# Altium PCB AIRCRAFT.PcbDoc (part 2 of 2)
Units mm, origin at the board's own origin, x right, y up, seen from the top; angles counter-clockwise.
Board outline 152.4 x 101.6 mm, 2 copper layers (Top Layer, Bottom Layer); 97 components, 77 nets, 515 pads, 0 vias.
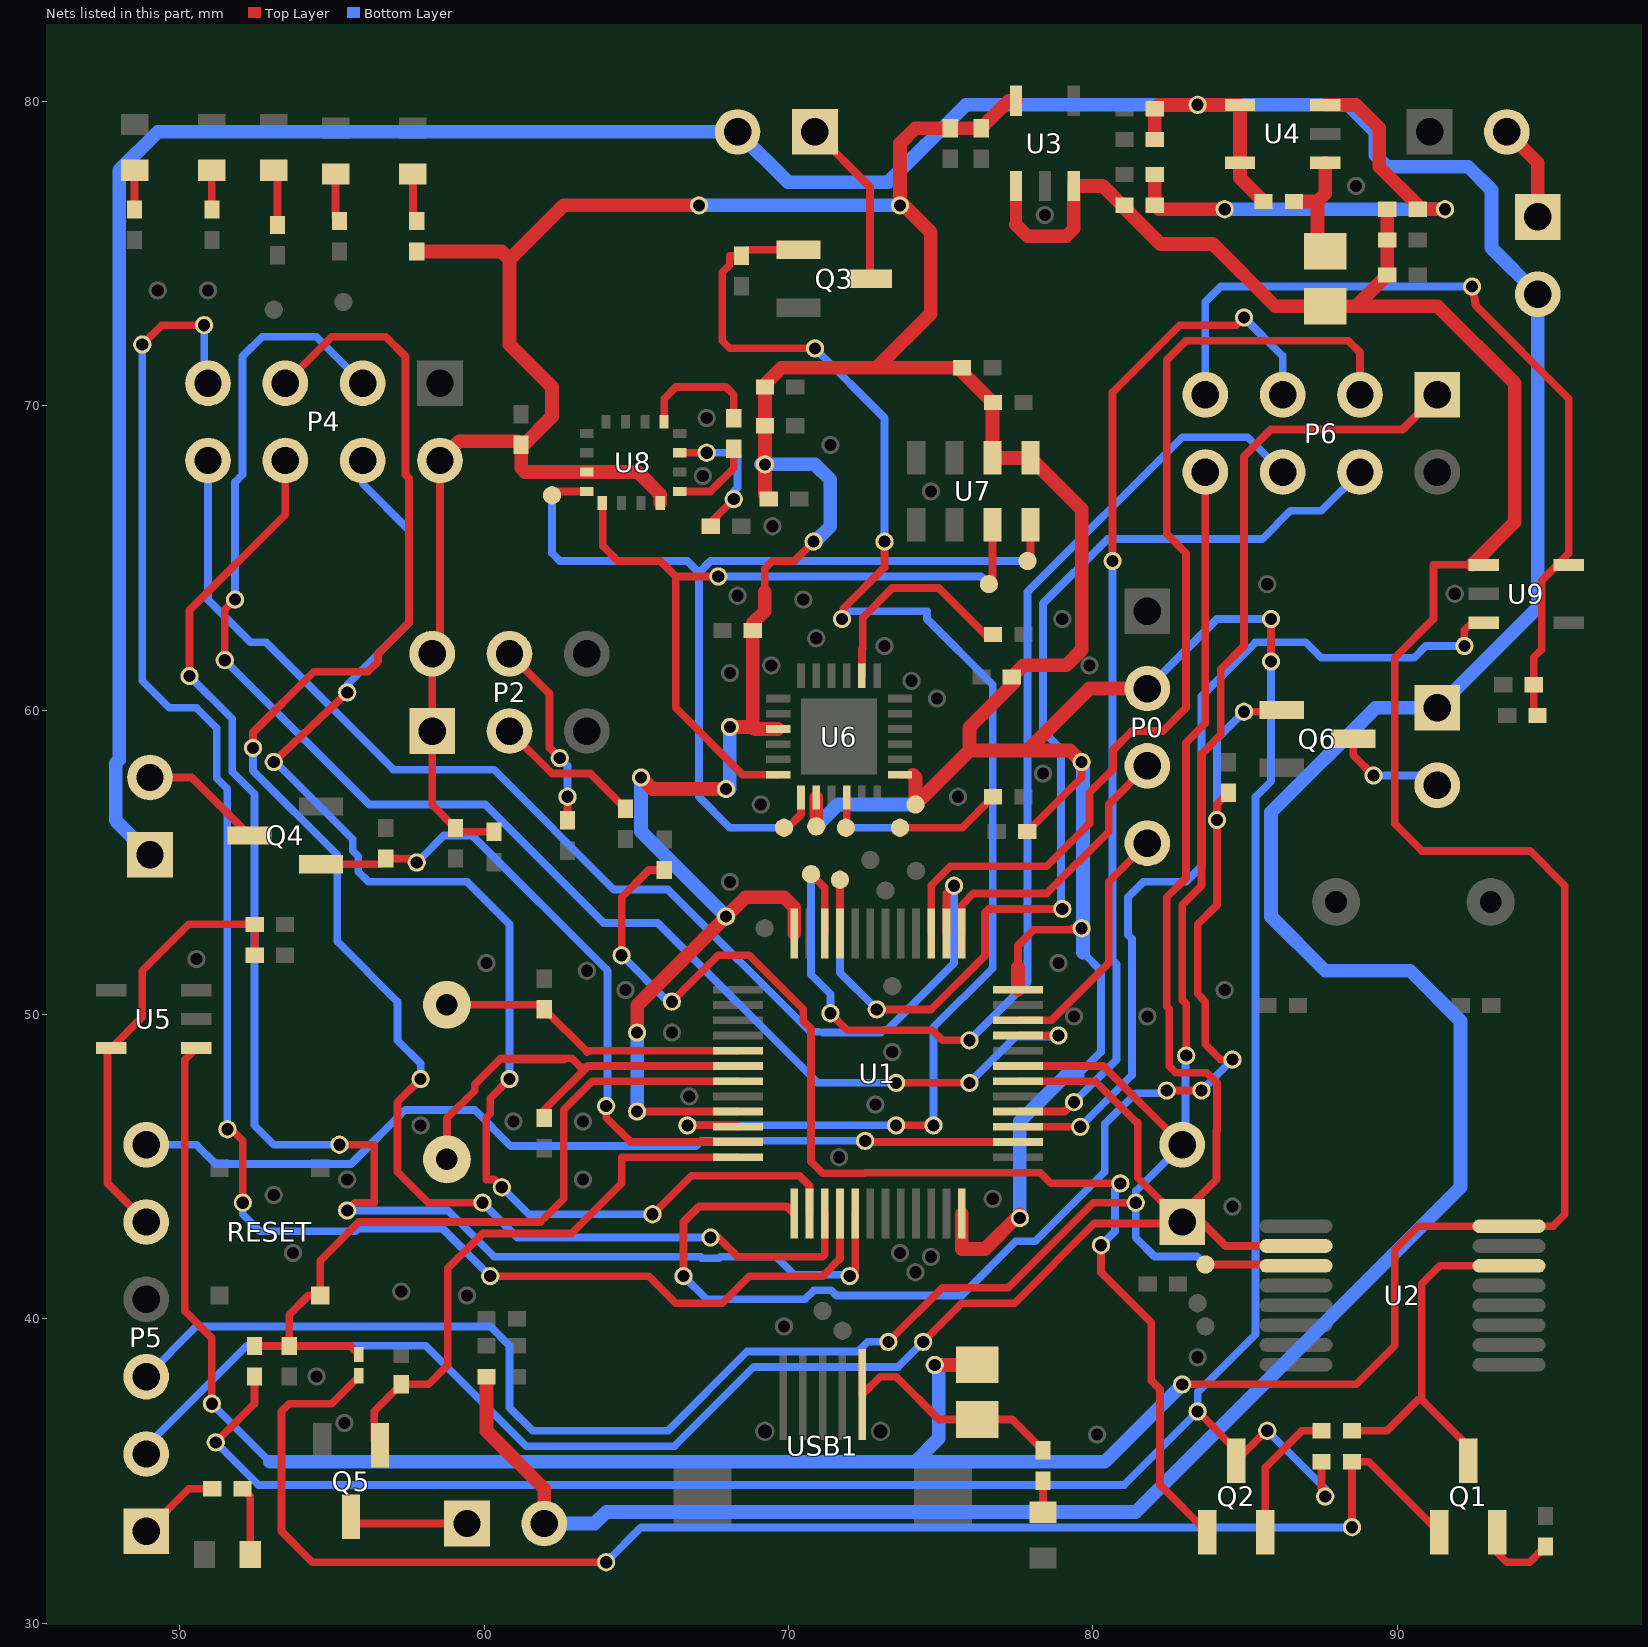
[diagram p2: the nets of this part, all layers, seen from the top]

## Nets (pads, with @x,y where several pads share a name; then routed paths per layer and width w, separated by ;. In a path a pad name is that pad's centre, name@x,y a point inside that pad or via, vN(x,y) a via of type N, cw(c..) or ccw(c..) an arc to the next point about the centre after c; other vN are vias at no path point) (continued)
NetC13_2: C13.2 pad.3@91.567,76.454 pad.4@84.328,76.454 R10.1 R11.2 U4.3 | length 16.8
  Top Layer w0.254: R10.1@82.034,76.581 R10.1@82.161,76.454 ; C13.2@90.67,76.454 C13.2@90.67,76.589
  Top Layer w0.45: R10.1@82.034,76.581 R11.2@82.034,77.597 ; R10.1@82.161,76.454 pad.4@84.328,76.454 ; U4.3@87.63,79.878 88.651,79.878 89.408,79.121 89.408,77.851 C13.2@90.67,76.589 ; C13.2@90.67,76.454 pad.3@91.567,76.454
  Bottom Layer w0.45: pad.4@84.328,76.454 pad.3@91.567,76.454
NetC19_1: C19.1 U6.20 | length 7
  Top Layer w0.254: U6.20@72.41,61.128 72.41,61.996 72.436,62.022 72.436,63.038 73.406,64.008 74.93,64.008 C19.1@76.454,62.484
NetC20_2: C20.2 pad.15@71.882,56.134 pad.16@73.66,56.134 U6.10 | length 6.1
  Top Layer w0.254: pad.15@71.91,56.289 U6.10@71.91,57.128 ; pad.16@73.66,56.134 75.7,56.134 C20.2@76.716,57.15
  Bottom Layer w0.254: pad.15@71.882,56.134 pad.16@73.66,56.134
NetC24_2: C24.2 pad.0@67.31,68.453 pad.1@68.199,66.929 U8.10 | length 4.6
  Top Layer w0.254: U8.10@66.421,68.453 pad.0@67.31,68.453 ; C24.2@67.445,66.04 67.445,66.175 pad.1@68.199,66.929
  Bottom Layer w0.254: pad.0@67.31,68.453 68.199,68.453 68.326,68.326 68.326,67.31 68.199,67.183 pad.1@68.199,66.929
NetC25_1: C25.1 U8.12 | length 2.7
  Top Layer w0.254: U8.12@66.421,67.183 67.437,67.183 68.199,67.945 C25.1@68.199,68.58
NetC25_2: C25.2 U8.8 | length 4.1
  Top Layer w0.254: U8.8@65.913,69.469 65.913,70.231 66.294,70.612 67.945,70.612 68.199,70.358 C25.2@68.199,69.588
NetD1_2: D1.2 pad.10@88.511,33.155 pad.12@64.008,32.004 Q1.1 R2.1 | length 49
  Top Layer w0.254: 54.96,37.211 53.594,37.211 53.34,36.957 53.34,33.02 54.356,32.004 pad.12@64.008,32.004 ; 54.991,37.211 D1.2@55.911,38.131 ; pad.10@88.511,33.155 R2.1@88.511,35.306 89.061,35.306 Q1.1@91.379,32.988
  Bottom Layer w0.254: pad.12@64.008,32.004 65.151,33.147 88.503,33.147 pad.10@88.511,33.155
NetD3_1: D3.1 L1.2 U4.1 | length 3.9
  Top Layer w0.254: D3.1@87.376,75.322 D3.1@87.63,75.068
  Top Layer w0.45: L1.2@86.606,76.708 87.376,76.708 ; D3.1@87.376,75.322 87.376,76.708 ; U4.1@87.63,77.978 87.63,76.962 87.376,76.708
NetJ1_1: J1.1 Q3.3 | length 5.6
  Top Layer w0.254: J1.1@70.866,78.994 72.676,77.184 Q3.3@72.676,74.168
NetJ2_2: J2.2 Q4.3 | length 4.1
  Top Layer w0.254: J2.2@49.022,57.785 50.387,57.785 Q4.3@52.292,55.88
NetJ3_1: J3.1 Q5.3 | length 3.9
  Top Layer w0.254: Q5.3@55.626,33.496 55.848,33.274 J3.1@59.436,33.274
NetJ4_2: J4.2 pad.7@89.218,57.848 Q6.3 | length 3.7
  Top Layer w0.254: Q6.3@88.551,59.055 88.551,58.515 pad.7@89.218,57.848
  Bottom Layer w0.254: pad.7@89.218,57.848 90.995,57.848 J4.2@91.313,57.531
NetLED1_1: LED1.1 R19.1 | length 1.3
  Top Layer w0.254: R19.1@48.514,76.446 LED1.1@48.514,77.736
NetLED2_1: LED2.1 R20.1 | length 1.3
  Top Layer w0.254: R20.1@51.054,76.446 LED2.1@51.054,77.736
NetLED3_1: LED3.1 R21.1 | length 1.9
  Top Layer w0.254: LED3.1@53.086,77.736 53.213,77.609 R21.1@53.213,75.938
NetLED4_1: LED4.1 R22.1 | length 1.6
  Top Layer w0.254: LED4.1@55.118,77.609 55.118,76.192 R22.1@55.245,76.065
NetLED5_1: 3D3.1 R23.1 | length 1.6
  Top Layer w0.254: 3D3.1@57.658,77.609 57.658,76.192 R23.1@57.785,76.065
NetLED6_1: R24.1 VBUS.1 | length 1
  Top Layer w0.254: VBUS.1@78.359,33.643 R24.1@78.359,34.679
NetLED7_1: BT.1 R25.1 | length 2.3
  Top Layer w0.254: R25.1@52.062,34.417 52.312,34.167 BT.1@52.312,32.258
NetP2_3: P2.3 R6.1 | length 4.9
  Top Layer w0.254: P2.3@60.833,59.309 62.23,57.912 63.492,57.912 R6.1@64.643,56.761
NetP2_4: P2.4 pad.20 pad.21@62.484,58.42 R7.2 | length 6
  Top Layer w0.254: P2.4@60.833,61.849 62.145,60.537 62.145,58.759 pad.21@62.484,58.42 ; R7.2@62.738,56.634 pad.20@62.738,57.15
  Bottom Layer w0.254: pad.21@62.484,58.42 62.738,58.166 pad.20@62.738,57.15
NetP3_2: P3.2 SW1.1 | length 3.4
  Top Layer w0.45: P3.2@93.472,79.121 94.615,77.978 SW1.1@94.615,76.2
NetQ1_2: Q1.2 R3.2 | length 2.6
  Top Layer w0.254: Q1.2@93.279,32.988 93.279,32.324 93.599,32.004 94.353,32.004 R3.2@94.869,32.52
NetQ2_1: pad.0@80.264,42.418 pad.1@80.899,44.45 pad.2@64.516,51.943 pad.3@66.167,50.419 Q2.1 R5.1 | length 40.3
  Top Layer w0.254: pad.2@64.516,51.943 64.516,53.848 65.413,54.745 R5.1@65.913,54.745 ; pad.3@66.167,50.419 67.691,51.943 68.707,51.943 70.485,50.165 70.485,49.784 70.739,49.53 70.739,45.166 71.12,44.785 72.503,44.785 72.517,44.799 78.264,44.799 78.613,44.45 pad.1@80.899,44.45 ; pad.0@80.264,42.418 80.264,41.529 81.915,39.878 81.915,37.973 82.203,37.685 82.203,34.544 Q2.1@83.759,32.988
  Bottom Layer w0.254: pad.2@64.516,51.943 66.04,50.419 pad.3@66.167,50.419 ; pad.0@80.264,42.418 80.726,42.88 80.726,44.233 pad.1@80.899,44.406
NetQ2_2: Q2.2 R4.2 | length 4.5
  Top Layer w0.254: Q2.2@85.659,32.988 85.659,35.113 86.868,36.322 R4.2@87.511,36.322
NRF_CE: P4.3 pad.4@78.867,49.307 pad.5@75.946,47.752 pad.6@73.533,47.752 pad.7@51.479,61.639 pad.8@51.816,63.627 U1.33 | length 50
  Top Layer w0.254: pad.7@51.479,61.639 51.479,63.29 pad.8@51.816,63.627 ; pad.6@73.533,47.752 pad.5@75.946,47.752 ; U1.33@77.537,49.307 pad.4@78.867,49.307
  Bottom Layer w0.254: pad.7@51.479,61.639 56.221,56.896 60.031,56.896 63.925,53.003 65.703,53.003 70.953,47.752 pad.6@73.533,47.752 ; pad.8@51.816,63.627 51.816,67.489 52.058,67.731 52.058,71.616 52.705,72.263 54.483,72.263 P4.3@56.007,70.739 ; pad.5@76.073,47.879 77.47,49.276 pad.4@78.867,49.276
NRF_CS: P4.4 pad.49@65.532,43.434 pad.50@60.579,44.323 pad.51 pad.52@53.086,58.293 pad.53 U1.14 | length 44.1
  Top Layer w0.254: pad.52@53.086,58.293 pad.53@55.499,60.579 ; pad.50@60.579,44.323 60.325,44.577 60.071,44.577 60.071,46.609 60.198,46.736 60.198,47.244 pad.51@60.833,47.879 ; pad.49@65.532,43.434 66.802,44.704 70.358,44.704 70.687,44.375 U1.14@70.687,43.457
  Bottom Layer w0.254: pad.52@53.114,58.321 55.683,55.753 55.683,55.381 55.865,55.199 55.865,54.691 56.2,54.356 59.436,54.356 60.833,52.959 pad.51@60.833,47.879 ; pad.53@55.499,60.579 55.499,60.833 57.531,62.865 57.531,65.913 56.007,67.437 P4.4@56.007,68.199 ; pad.50@60.706,44.196 61.468,43.434 pad.49@65.532,43.434
NRF_IRQ: P4.8 pad.16@75.438,54.229 U1.38 | length 39.8
  Top Layer w0.254: U1.38@75.187,52.657 75.187,53.978 pad.16@75.311,54.102
  Bottom Layer w0.254: P4.8@50.927,68.199 50.927,63.627 52.324,62.23 52.832,62.23 57.023,58.039 60.325,58.039 64.262,54.102 66.04,54.102 70.707,49.435 70.993,49.435 ; 71.12,49.403 73.025,49.403 73.106,49.484 73.233,49.484 75.438,51.689 pad.16@75.438,54.229
NRF_MISO: P4.7 pad.61 pad.62 pad.63 pad.64 pad.65 U1.16 | length 57.8
  Top Layer w0.254: pad.64@48.768,72.009 49.403,72.644 pad.65@50.8,72.644 ; pad.63@51.562,46.228 51.689,46.228 52.07,45.847 pad.62@52.07,43.815 ; pad.61@60.198,41.402 65.405,41.402 66.294,40.513 67.818,40.513 68.707,41.402 71.12,41.402 71.687,41.969 U1.16@71.687,43.457
  Bottom Layer w0.254: pad.64@48.768,72.009 48.768,60.96 49.657,60.071 50.546,60.071 51.216,59.401 51.216,57.763 51.562,57.417 pad.63@51.562,46.228 ; pad.65@50.8,72.644 50.8,70.866 P4.7@50.927,70.739 ; pad.62@52.07,43.815 52.07,43.434 52.624,42.88 55.781,42.88 55.869,42.968 58.632,42.968 pad.61@60.198,41.402
NRF_MOSI: P4.6 pad.48@72.009,41.402 pad.58 pad.59 pad.60 U1.17 | length 50.3
  Top Layer w0.254: pad.60@50.32,61.115 50.32,63.274 53.467,66.421 P4.6@53.467,68.199 ; pad.59@55.245,45.72 56.388,45.72 56.388,43.815 55.753,43.815 pad.58@55.499,43.561 ; pad.48@72.187,41.58 U1.17@72.187,43.457
  Bottom Layer w0.254: pad.60@50.32,61.115 51.724,59.712 51.724,57.974 52.451,57.247 52.451,46.355 53.086,45.72 pad.59@55.245,45.72 ; pad.58@55.499,43.561 58.801,43.561 60.325,42.037 67.109,42.037 67.155,41.991 67.719,41.991 67.765,42.037 69.596,42.037 70.104,41.529 ; 70.185,41.448 71.963,41.448 pad.48@72.009,41.402
NRF_SCK: P4.5 pad.54 pad.55 pad.56 pad.57 U1.15 | length 54.1
  Top Layer w0.254: pad.57@52.405,58.755 52.405,59.263 54.402,61.26 56.18,61.26 56.515,61.595 56.515,61.849 57.531,62.865 57.531,67.616 57.416,67.731 57.416,71.616 56.769,72.263 54.991,72.263 P4.5@53.467,70.739 ; pad.56@57.912,47.879 57.15,47.117 57.15,44.831 58.166,43.815 pad.55@59.944,43.815 ; pad.54@67.437,42.672 67.691,42.672 68.326,42.037 71.12,42.037 71.187,42.104 U1.15@71.187,43.457
  Bottom Layer w0.254: pad.57@52.451,58.801 pad.57@52.405,58.755 52.405,58.011 55.171,55.245 55.171,52.398 57.15,50.419 57.15,49.149 57.912,48.387 pad.56@57.912,47.879 ; pad.55@59.944,43.815 61.087,42.672 pad.54@67.437,42.672
NRST: C1.1 D1.1 R1.1 RESET.1 U1.7 | length 24.7
  Top Layer w0.254: R1.1@52.451,39.108 C1.1@53.594,39.108 ; D1.1@55.88,38.831 55.603,39.108 C1.1@53.594,39.108 ; 61.849,43.18 55.88,43.18 54.61,41.91 RESET.1@54.61,40.767 54.229,40.767 53.594,40.132 C1.1@53.594,39.108 ; 61.976,43.307 62.611,43.942 62.611,46.863 63.555,47.807 U1.7@68.337,47.807
OSC_IN: C5.2 U1.5 Y1.1 | length 10.2
  Top Layer w0.254: Y1.1@58.776,50.317 61.832,50.317 C5.2@61.976,50.173 63.381,48.768 63.42,48.807 U1.5@68.337,48.807
OSC_OUT: C4.1 U1.6 Y1.2 | length 16
  Top Layer w0.254: Y1.2@58.776,45.237 58.776,46.584 59.69,47.498 59.69,47.699 60.551,48.56 62.871,48.56 63.171,48.26 63.29,48.26 ; 60.706,48.514 62.611,48.514 ; C4.1@61.976,46.601 61.976,46.863 63.42,48.307 U1.6@68.337,48.307
PWM1: pad.11@70.866,71.882 pad.12@73.152,65.532 pad.15@71.755,62.992 pad.24@66.675,46.355 pad.26@74.759,46.355 pad.28@73.533,46.355 Q3.1 R15.2 U1.10 | length 50
  Top Layer w0.254: pad.24@66.675,46.355 68.289,46.355 U1.10@68.337,46.307 ; Q3.1@70.326,75.118 68.649,75.118 R15.2@68.453,74.922 68.064,74.922 68.064,74.622 67.822,74.38 67.822,72.132 68.072,71.882 pad.11@70.866,71.882 ; pad.15@71.797,63.034 71.797,63.331 73.152,64.687 pad.12@73.152,65.532 ; pad.28@73.533,46.355 pad.26@74.759,46.355
  Bottom Layer w0.254: pad.24@66.675,46.355 pad.28@73.533,46.355 ; pad.11@70.866,71.882 73.152,69.596 pad.12@73.152,65.532 ; pad.15@71.755,63.119 pad.15@71.755,62.992 71.882,63.246 74.549,63.246 ; 74.549,63.119 74.549,62.992 76.708,60.833 76.708,51.522 74.759,49.574 pad.26@74.759,46.355
PWM2: pad.46@64.008,46.99 pad.47@57.785,54.991 Q4.1 R16.2 U1.11 | length 20.9
  Top Layer w0.254: Q4.1@54.642,54.93 R16.2@56.573,54.93 ; R16.2@56.769,55.126 57.158,55.126 57.15,55.118 pad.47@57.912,55.118 ; pad.46@64.008,46.99 64.008,46.609 64.81,45.807 U1.11@68.337,45.807
  Bottom Layer w0.254: pad.47@57.912,55.118 58.674,55.88 59.61,55.88 64.054,51.436 64.054,47.036 pad.46@64.008,46.99
PWM3: Q5.1 R17.2 U1.12 | length 19
  Top Layer w0.254: Q5.1@56.576,35.846 56.388,36.034 56.388,36.965 R17.2@57.277,37.854 58.174,37.854 58.801,38.481 58.801,41.656 59.944,42.799 62.865,42.799 64.516,44.45 64.516,45.307 U1.12@68.337,45.307
PWM4: pad.22@84.582,48.514 pad.25@84.074,56.388 pad.26@84.963,59.944 pad.39@83.566,47.498 pad.40@82.423,47.498 pad.66 Q6.1 R18.2 U1.13 | length 43.5
  Top Layer w0.254: pad.66@66.548,41.402 66.548,43.18 67.056,43.688 69.948,43.688 U1.13@70.179,43.457 ; pad.40@82.423,47.498 pad.39@83.566,47.498 ; R18.2@84.455,57.285 84.074,56.904 pad.25@84.074,56.388 84.074,53.594 83.439,52.959 83.439,50.684 83.571,50.553 83.571,50.541 83.693,50.419 83.693,49.022 84.201,48.514 pad.22@84.582,48.514 ; pad.26@84.963,59.944 85.598,59.944 85.659,60.005 Q6.1@86.201,60.005
  Bottom Layer w0.254: pad.66@66.548,41.402 67.31,40.64 70.538,40.64 70.838,40.94 71.402,40.94 71.575,40.767 75.692,40.767 77.47,42.545 78.105,42.545 80.391,44.831 80.391,46.399 81.407,47.415 82.34,47.415 pad.40@82.423,47.498 ; pad.39@83.566,47.498 pad.22@84.582,48.514 ; pad.25@84.074,56.388 84.074,59.055 pad.26@84.963,59.944
Q_SCL: pad.7@69.85,56.134 pad.8@62.23,67.056 pad.9@77.851,64.897 U6.7 U7.8 U8.1 | length 32
  Top Layer w0.254: pad.8@62.382,67.183 U8.1@63.373,67.183 ; pad.7@69.85,56.134 69.977,56.134 70.41,56.567 U6.7@70.41,57.128 ; pad.9@77.851,64.897 77.948,64.994 U7.8@77.948,66.083
  Bottom Layer w0.254: pad.8@62.23,67.056 62.23,65.151 62.484,64.897 66.675,64.897 67.056,64.516 ; pad.7@69.85,56.134 68.072,56.134 67.056,57.15 67.056,64.516 ; pad.9@77.851,64.897 67.437,64.897 67.056,64.516
Q_SDA: pad.5@67.691,64.389 pad.10@76.581,64.135 U6.6 U7.7 U8.16 | length 25.2
  Top Layer w0.254: U8.16@63.893,66.79 63.893,65.393 64.389,64.897 65.786,64.897 66.294,64.389 ; pad.5@67.691,64.389 66.294,64.389 ; U6.6@69.66,57.878 68.487,57.878 66.294,60.071 66.294,64.389 ; pad.10@76.581,64.135 76.698,64.252 U7.7@76.698,66.083
  Bottom Layer w0.254: pad.5@67.691,64.389 76.327,64.389 pad.10@76.581,64.135
RTS: Q1.3 R4.1 U2.14 | length 12.3
  Top Layer w0.254: R4.1@88.511,36.322 89.662,36.322 90.678,37.338 90.805,37.338 ; Q1.3@92.329,35.338 92.329,35.814 90.805,37.338 ; U2.14@93.67,41.742 91.399,41.742 90.805,41.148 90.805,37.338
RXD_BT: P1.2 P5.3 P6.1 pad.0@83.693,41.783 pad.19@83.063,48.646 pad.70 pad.71 U1.31 U2.3 | length 85.1
  Top Layer w0.254: pad.70@73.279,39.243 75.057,41.021 77.216,41.021 80.01,43.815 pad.71@81.407,43.815 ; U1.31@77.537,48.307 80.344,48.307 P1.2@82.931,45.72 ; pad.19@83.063,48.646 83.063,50.342 82.931,50.474 82.931,53.594 83.566,54.229 83.566,58.547 84.201,59.182 84.201,61.341 84.963,62.103 84.963,68.338 85.84,69.215 90.17,69.215 P6.1@91.313,70.358 ; pad.0@83.693,41.783 86.629,41.783 U2.3@86.67,41.742
  Bottom Layer w0.254: P5.3@48.895,38.1 50.546,39.751 60.198,39.751 60.833,39.116 60.833,37.084 61.595,36.322 66.04,36.322 68.646,38.928 72.285,38.928 72.6,39.243 pad.70@73.025,39.243 ; P1.2@82.931,45.72 81.407,44.196 81.407,42.665 82.023,42.049 83.427,42.049 pad.0@83.693,41.783 ; P1.2@83.038,45.827 83.038,48.621 pad.19@83.063,48.646
SWCLK: P0.3 U1.37 | length 9.4
  Top Layer w0.254: U1.37@75.687,52.657 75.687,53.589 76.073,53.975 78.486,53.975 80.518,56.007 80.518,56.896 P0.3@81.788,58.166
SWDIO: P0.4 U1.34 | length 8.2
  Top Layer w0.254: U1.34@77.537,49.807 78.636,49.807 80.518,51.689 80.518,54.356 P0.4@81.788,55.626
TXD_BT: P1.1 P5.2 P6.8 pad.72 U1.30 U2.2 | length 79.5
  Top Layer w0.254: pad.72@74.422,39.243 75.692,40.513 77.426,40.513 80.047,43.134 82.885,43.134 P1.1@82.931,43.18 ; U1.30@77.537,47.807 80.082,47.807 81.427,46.462 81.471,46.462 81.471,44.64 P1.1@82.931,43.18 ; P6.8@83.693,67.818 83.693,59.563 83.058,58.928 83.058,54.483 82.423,53.848 82.423,50.264 82.504,50.183 82.504,48.306 82.723,48.087 83.739,48.087 84.074,47.752 84.074,46.2 ; 84.062,46.188 84.062,44.589 82.931,43.458 P1.1@82.931,43.18 ; U2.2@86.67,42.392 84.354,42.392 83.566,43.18 P1.1@82.931,43.18
  Bottom Layer w0.254: P5.2@48.895,35.56 48.895,35.814 52.197,39.116 58.083,39.116 61.385,35.814 66.25,35.814 68.856,38.42 73.599,38.42 pad.72@74.422,39.243 pad.72@74.422,39.37
V3D3: C2.1 C3.1 C9.1 C10.1 C18.1 C21.2 C22.2 C23.2 C26.2 P0.2 P2.1 P2.2 P4.2 pad.0@79.629,58.293 pad.1@79.629,52.832 pad.3@69.223,68.072 pad.4@70.822,65.532 pad.4@85.725,36.322 pad.5@87.63,34.163 pad.6@85.852,62.992 pad.7@67.056,76.581 pad.8@73.66,76.581 pad.8@85.852,61.595 pad.9@83.439,36.957 pad.13@51.181,35.941 pad.14@70.91,56.178 pad.17@74.168,56.896 pad.25@77.597,43.307 pad.32@65.024,49.403 pad.34@65.024,46.807 pad.42@68.072,59.444 pad.43@67.945,57.404 pad.44@65.151,57.785 pad.45@67.945,53.213 Q2.3 R1.2 R2.2 R12.2 R13.2 R14.2 R23.2 R26.1 U1.9 U1.24 U1.36 U1.48 U3.5 U6.3 U6.8 U6.13 U7.1 U7.2 U8.2 U8.13 | length 246.3
  Top Layer w0.254: pad.13@51.181,35.941 52.451,37.211 R1.2@52.451,38.108 ; P4.2@58.547,68.199 58.547,62.103 P2.2@58.293,61.849 P2.1@58.293,59.309 58.293,56.888 C2.1@59.055,56.126 59.182,55.999 C3.1@60.325,55.999 ; C26.2@61.095,68.834 C26.2@61.214,68.715 C26.2@61.303,68.715 ; 61.214,67.945 61.341,67.818 ; pad.34@65.024,46.807 U1.9@68.337,46.807 ; 68.826,59.444 68.892,59.378 ; 69.215,63.881 69.215,64.643 69.469,64.897 70.187,64.897 pad.4@70.822,65.532 pad.4@70.866,65.532 ; R13.2@69.223,70.612 R13.2@69.223,70.701 ; U6.13@73.66,57.878 74.075,57.878 ; U1.24@75.687,43.457 U1.24@75.692,43.452 ; 77.537,51.539 77.537,52.264 78.059,52.786 79.583,52.786 pad.1@79.629,52.832 79.322,52.832 ; R26.1@77.843,56.007 79.629,57.793 pad.0@79.629,58.293 ; pad.9@83.439,36.957 84.709,35.687 Q2.3@84.709,35.338 85.693,36.322 pad.4@85.725,36.322 ; pad.8@85.852,61.595 pad.6@85.852,62.992 ; R2.2@87.511,35.306 87.511,34.282 pad.5@87.63,34.163
  Top Layer w0.45: R23.2@57.785,75.065 60.571,75.065 60.833,74.803 ; P4.2@58.547,68.199 59.182,68.834 C26.2@61.095,68.834 ; 61.214,67.945 C26.2@61.214,68.715 ; C26.2@61.303,68.715 62.23,69.642 62.23,70.612 60.833,72.009 60.833,74.803 ; 61.341,67.818 U8.2@63.373,67.818 65.049,67.818 65.786,67.081 U8.13@65.786,66.802 ; pad.32@65.024,49.403 65.024,50.292 68.58,53.848 69.85,53.848 70.187,53.511 U1.48@70.187,52.657 ; pad.44@65.151,57.785 65.532,57.404 pad.43@67.945,57.404 ; pad.7@67.056,76.581 62.611,76.581 60.833,74.803 ; pad.42@68.072,59.444 68.826,59.444 C18.1@68.826,62.611 68.826,62.857 69.215,63.246 69.215,63.881 ; 68.892,59.378 U6.3@69.66,59.378 ; R14.2@69.223,67.056 pad.3@69.223,68.072 R12.2@69.223,69.342 R13.2@69.223,70.612 ; R13.2@69.223,70.701 69.765,71.243 72.894,71.243 ; pad.14@70.91,56.178 U6.8@70.91,57.128 ; 74.075,57.878 74.168,57.785 pad.17@74.168,56.896 75.946,58.674 ; U1.24@75.692,43.452 75.692,42.291 76.454,42.291 pad.25@77.597,43.434 ; U3.5@77.47,80.016 77.23,80.016 C9.1@76.327,79.113 C10.1@75.311,79.113 74.16,79.113 73.66,78.613 73.66,76.708 74.676,75.692 74.676,73.025 72.894,71.243 ; U1.36@77.537,50.807 77.537,51.539 ; pad.0@79.629,58.293 79.248,58.674 77.851,58.674 ; P0.2@81.788,60.706 79.883,60.706 77.851,58.674 ; 72.894,71.243 75.569,71.243 76.698,70.114 U7.2@76.698,68.283 U7.1@77.948,68.283 79.629,66.602 79.629,61.976 79.121,61.468 77.716,61.468 77.397,61.149 77.397,60.887 75.946,59.436 75.946,58.674 ; 75.946,58.674 77.851,58.674
  Bottom Layer w0.254: pad.13@51.181,35.941 52.578,34.544 81.026,34.544 pad.9@83.439,36.957 83.439,37.592 85.344,39.497 85.344,57.15 85.852,57.658 pad.8@85.852,61.595 ; 79.502,48.006 80.264,48.768 80.264,51.435 79.675,52.024 ; pad.0@79.629,58.293 pad.0@79.675,58.247 ; P0.2@81.788,60.706 84.074,62.992 pad.6@85.852,62.992 ; pad.4@85.725,36.322 pad.5@87.63,34.417
  Bottom Layer w0.45: pad.34@65.024,46.807 pad.32@65.024,49.403 ; pad.44@65.151,57.785 65.151,56.007 pad.45@67.945,53.213 ; pad.7@67.056,76.581 pad.8@73.66,76.581 ; pad.43@68.072,57.404 pad.42@68.072,59.444 ; pad.3@69.096,68.072 70.866,68.072 71.374,67.564 71.374,66.04 pad.4@70.866,65.532 ; pad.14@70.91,56.178 71.628,56.896 pad.17@74.168,56.896 ; pad.25@77.597,43.307 77.597,46.482 79.121,48.006 79.502,48.006 ; 79.675,52.024 pad.0@79.675,58.247
V5D0: C13.1 C14.1 C15.1 D2.2 D3.2 pad.68 pad.69 pad.73 R10.2 U2.16 U3.1 U3.3 U5.1 U9.1 | length 127.4
  Top Layer w0.254: U5.1@50.546,48.895 50.165,48.514 50.165,40.259 51.054,39.37 pad.73@51.054,37.211 ; D2.2@76.2,38.492 D2.2@76.211,38.481 ; R10.2@80.961,76.581 R10.2@81.034,76.581 R10.2@81.034,76.492 ; pad.68@82.931,37.846 88.646,37.846 89.916,39.116 89.916,42.269 90.689,43.042 U2.16@93.67,43.042 95.112,43.042 95.504,43.434 95.504,54.229 94.361,55.372 90.805,55.372 89.916,56.261 89.916,61.722 91.186,62.992 91.186,64.77 U9.1@92.456,64.77
  Top Layer w0.4: 77.47,75.946 U3.1@77.47,77.216
  Top Layer w0.45: pad.69@74.803,38.481 D2.2@76.211,38.481 ; 77.47,75.946 77.851,75.565 79.121,75.565 79.37,75.814 U3.3@79.37,77.216 80.326,77.216 R10.2@80.961,76.581 ; R10.2@81.034,76.492 82.215,75.311 83.947,75.311 85.99,73.268 D3.2@87.63,73.268 88.643,73.268 ; C13.1@89.67,76.454 C14.1@89.67,75.438 C15.1@89.67,74.295 88.643,73.268 ; U9.1@92.456,64.77 93.853,66.167 93.853,70.739 91.324,73.268 88.643,73.268
  Bottom Layer w0.254: pad.73@51.054,37.211 52.959,35.306 ; pad.69@74.803,38.481 pad.69@74.93,38.354
  Bottom Layer w0.45: 52.959,35.306 74.168,35.306 ; pad.69@74.93,38.354 74.93,36.068 74.168,35.306 ; pad.68@82.931,37.846 80.391,35.306 74.168,35.306
V33BT: C16.1 C17.1 P5.5 U5.5 | length 14.5
  Top Layer w0.254: P5.5@48.895,43.18 47.625,44.45 47.625,48.774 U5.5@47.746,48.895 48.768,49.917 48.768,51.435 50.292,52.959 C17.1@52.459,52.959 ; C16.1@52.459,51.943 C17.1@52.459,52.832
V33WIFI: C30.1 C31.1 P6.7 pad.6@92.456,73.914 U9.5 | length 27.9
  Top Layer w0.245: U9.5@95.25,64.77 95.631,65.151 95.631,70.231
  Top Layer w0.254: pad.6@92.456,73.914 92.583,73.279 95.631,70.231 ; C31.1@94.607,59.817 94.48,59.944 C30.1@94.48,60.833 94.48,61.73 94.742,61.992 94.742,64.256 95.25,64.764 U9.5@95.25,64.77
  Bottom Layer w0.254: P6.7@83.693,70.358 83.693,73.406 84.201,73.914 pad.6@92.456,73.914
VBUS: D2.1 R24.2 USB1.1 | length 8.3
  Top Layer w0.254: USB1.1@72.42,38.638 USB1.1@72.42,37.512 73.008,38.1 73.533,38.1 74.941,36.692 D2.1@76.2,36.692 77.346,36.692 R24.2@78.359,35.679
VSYS: C11.1 C12.1 J1.2 J2.1 J3.2 J4.1 L1.1 pad.1@83.439,79.883 R8.1 SW1.2 U4.4 U4.5 | length 162
  Top Layer w0.254: C11.1@82.034,79.756 C11.1@82.156,79.878
  Top Layer w0.45: R8.1@60.079,38.1 60.079,36.314 61.976,34.417 J3.2@61.976,33.274 ; C12.1@82.034,78.74 C11.1@82.034,79.756 ; C11.1@82.156,79.878 U4.4@84.83,79.878 U4.5@84.83,77.978 84.83,77.484 L1.1@85.606,76.708
  Bottom Layer w0.45: J2.1@49.022,55.245 47.891,56.376 47.891,58.253 48.006,58.368 48.006,77.724 49.276,78.994 J1.2@68.326,78.994 69.977,77.343 73.279,77.343 75.819,79.883 pad.1@83.439,79.883 88.392,79.883 89.281,78.994 89.281,78.232 89.662,77.851 92.329,77.851 93.091,77.089 93.091,75.184 SW1.2@94.615,73.66 94.615,63.373 J4.1@91.313,60.071 89.281,60.071 85.852,56.642 85.852,53.213 87.63,51.435 90.424,51.435 92.075,49.784 92.075,44.323 81.407,33.655 64.008,33.655 63.627,33.274 J3.2@61.976,33.274
WIFI_EN: pad.17@79.581,46.307 pad.18@92.202,62.103 U1.27 U9.3 | length 29.4
  Top Layer w0.254: U1.27@77.537,46.307 pad.17@79.581,46.307 ; pad.18@92.202,62.103 92.202,62.616 U9.3@92.456,62.87
  Bottom Layer w0.254: pad.17@79.581,46.307 81.28,48.006 81.28,52.488 81.153,52.615 81.153,53.848 81.661,54.356 83.058,54.356 83.566,54.864 83.566,60.452 85.344,62.23 86.995,62.23 87.503,61.722 90.551,61.722 90.932,62.103 pad.18@92.202,62.103
WIFI_IO0: P6.6 pad.11@70.739,54.61 pad.24@71.374,50.038 pad.29@75.946,49.149 U1.46 | length 38.1
  Top Layer w0.254: pad.11@70.739,54.61 71.187,54.162 U1.46@71.187,52.657 ; pad.24@71.374,50.038 71.928,49.484 74.723,49.484 75.058,49.149 pad.29@75.692,49.149
  Bottom Layer w0.254: pad.11@70.739,54.61 70.739,51.308 71.374,50.673 pad.24@71.374,50.038 ; pad.29@75.946,49.149 77.851,51.054 77.851,63.881 82.931,68.961 85.09,68.961 P6.6@86.233,67.818
WIFI_IO2: P6.4 pad.13@71.687,54.424 pad.23@72.898,50.165 pad.30@78.994,53.467 U1.45 | length 37.3
  Top Layer w0.254: U1.45@71.687,52.657 pad.13@71.687,54.424 ; pad.23@72.898,50.165 74.686,50.165 76.454,51.933 76.454,53.34 76.581,53.467 pad.30@78.994,53.467
  Bottom Layer w0.254: pad.13@71.687,54.424 71.687,51.376 pad.23@72.898,50.165 ; pad.30@78.994,53.467 78.948,53.513 78.948,58.72 78.359,59.309 78.359,63.5 80.476,65.617 85.556,65.617 86.487,66.548 87.503,66.548 P6.4@88.773,67.818
WIFI_IO16: P6.5 pad.13@79.375,47.117 pad.14@80.645,64.897 pad.16@84.963,72.898 U1.28 | length 34.3
  Top Layer w0.254: U1.28@77.537,46.807 79.065,46.807 pad.13@79.375,47.117 ; pad.14@80.645,64.897 80.645,70.441 82.848,72.644 84.709,72.644 pad.16@84.963,72.898
  Bottom Layer w0.254: pad.13@79.375,47.117 80.772,48.514 80.772,51.645 80.645,51.772 pad.14@80.645,64.897 ; pad.16@84.963,72.898 86.233,71.628 P6.5@86.233,70.358
WIFI_PD: P6.3 U1.39 | length 33.2
  Top Layer w0.254: U1.39@74.687,52.657 74.687,54.24 75.311,54.864 78.486,54.864 79.883,56.261 79.883,57.277 80.657,58.051 80.657,58.686 81.28,59.309 82.296,59.309 83.058,60.071 83.058,65.151 82.423,65.786 82.423,71.501 83.058,72.136 88.392,72.136 88.773,71.755 P6.3@88.773,70.358
WLBT_EN: P5.6 pad.29@72.517,45.847 U1.26 | length 30.3
  Top Layer w0.254: pad.29@72.43,45.807 U1.26@77.537,45.807
  Bottom Layer w0.254: P5.6@48.895,45.72 50.546,45.72 51.181,45.085 55.626,45.085 57.404,46.863 59.69,46.863 60.879,45.674 66.957,45.674 67.13,45.847 pad.29@72.517,45.847
WLBT_STATE: P5.1 R25.2 | length 2.7
  Top Layer w0.254: P5.1@48.895,33.02 50.292,34.417 R25.2@51.062,34.417
pads on no net: RESET.3 RESET.4 U1.1 U1.2 U1.3 U1.4 U1.19 U2.9 U2.10 U2.11 U2.12 U2.15 U3.4 U5.4 U6.2 U6.4 U6.5 U6.14 U6.16 U6.19 U6.21 U6.22 U6.25 U7.6 U8.3 U8.4 U8.5 U8.6 U8.7 U8.14 U9.4 USB1. USB1.4 USB1.MH1 USB1.MH2

## Polygon pours and split planes (outlines as drawn)
GND on Bottom Layer "Top Layer-No Net" (solid, pour order 54): 46.863,81.153 46.863,31.242 96.774,31.242 96.647,31.369 96.647,81.153
GND on Top Layer "Top Layer-No Net" (solid, pour order 56): 46.863,81.28 46.863,31.115 46.99,31.242 96.774,31.242 96.774,81.28

## Silkscreen, mask and mechanical layers (free items; w line width, h text height)
Top Overlay:
  text "Athenav2" at 58.928,78.867 h1
  text "alex wang" at 60.452,77.47 h0.6
  text "BOOT1" at 65.024,61.595 h0.6
  text "BOOT0" at 53.848,59.055 h0.6
  text "RX" at 80.391,45.593 h0.6
  text "TX" at 80.518,42.799 h0.6
Mechanical 1:
  lines w0.254: 52.832,47.879 cw(c54.808,48.191) 52.842,47.822 ; 52.832,63.627 cw(c54.808,63.939) 52.842,63.57 ; 61.976,38.608 cw(c63.952,38.92) 61.986,38.551 ; 62.357,72.644 cw(c64.333,72.956) 62.367,72.587 ; 77.587,38.538 cw(c79.563,38.85) 77.597,38.481 ; 77.724,72.644 cw(c79.7,72.956) 77.734,72.587 ; 86.731,63.811 cw(c88.707,64.123) 86.741,63.754 ; 86.741,48.133 cw(c88.717,48.445) 86.751,48.076 ; 46.863,31.242 46.863,81.153 96.774,81.153 96.774,31.242 46.863,31.242

## Text inside footprints (layer, text, board x,y; h text height)
P2: Top Overlay "6" at 61.849,61.468 h0.6; Top Overlay "5" at 61.849,58.801 h0.6; Top Overlay "2" at 59.182,61.595 h0.6; Top Overlay "1" at 59.309,59.182 h0.6
P4: Top Overlay "2" at 61.087,68.707 h1.27 r180; Top Overlay "1" at 60.579,71.247 h1.27 r180; Top Overlay "7" at 49.403,71.247 h1.27 r180; Top Overlay "8" at 49.403,68.707 h1.27 r180
P6: Top Overlay "2" at 93.853,68.326 h1.27 r180; Top Overlay "1" at 93.345,70.866 h1.27 r180; Top Overlay "7" at 82.169,70.866 h1.27 r180; Top Overlay "8" at 82.169,68.326 h1.27 r180